# Altium PCB sensorpcb-1.pcbdoc
Units mil, origin at the board's own origin, x right, y up, seen from the top; angles counter-clockwise.
Board outline 3790 x 3065 mil, 2 copper layers (Top Layer, Bottom Layer); 25 components, 27 nets, 65 pads, 0 vias.
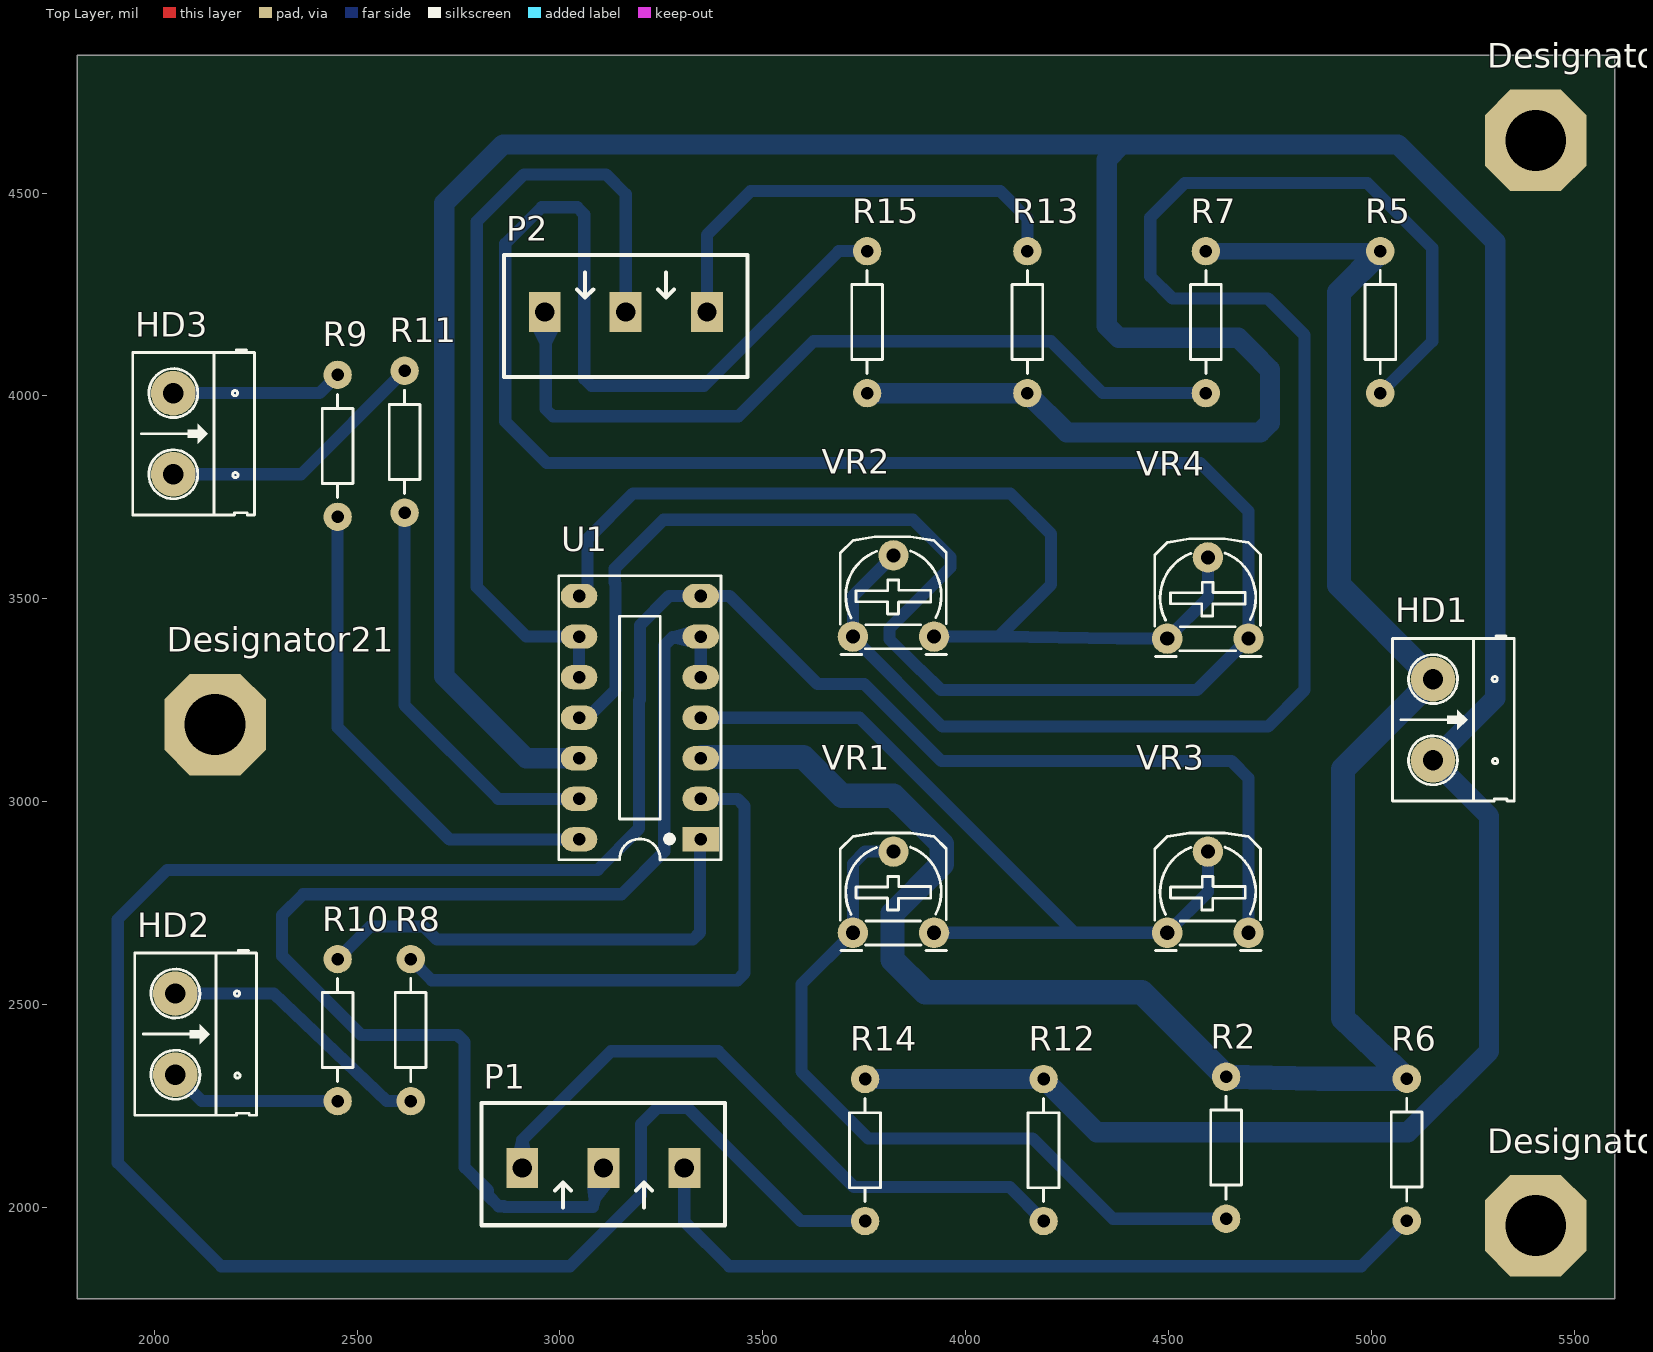
[diagram p0: Top Layer view]
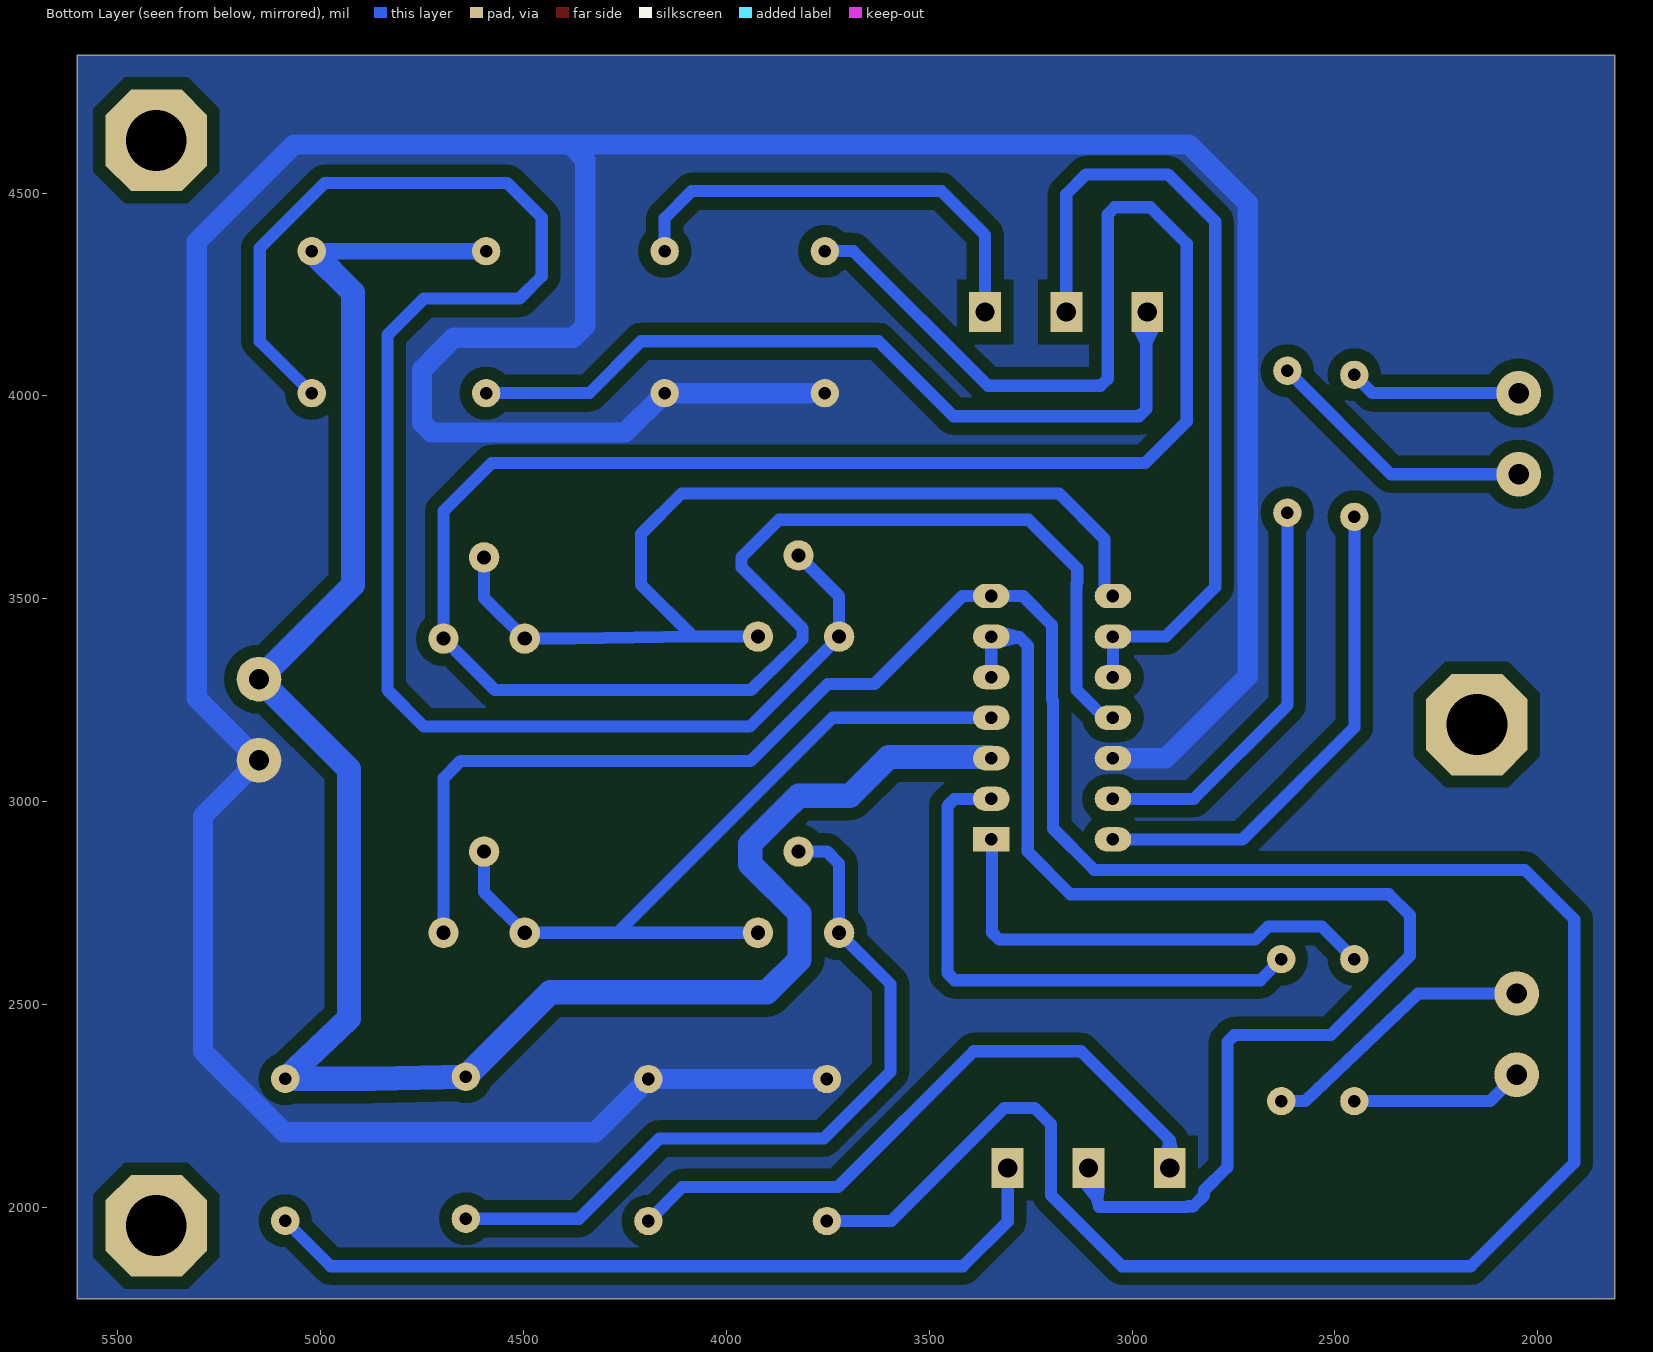
[diagram p1: Bottom Layer view, seen from below]
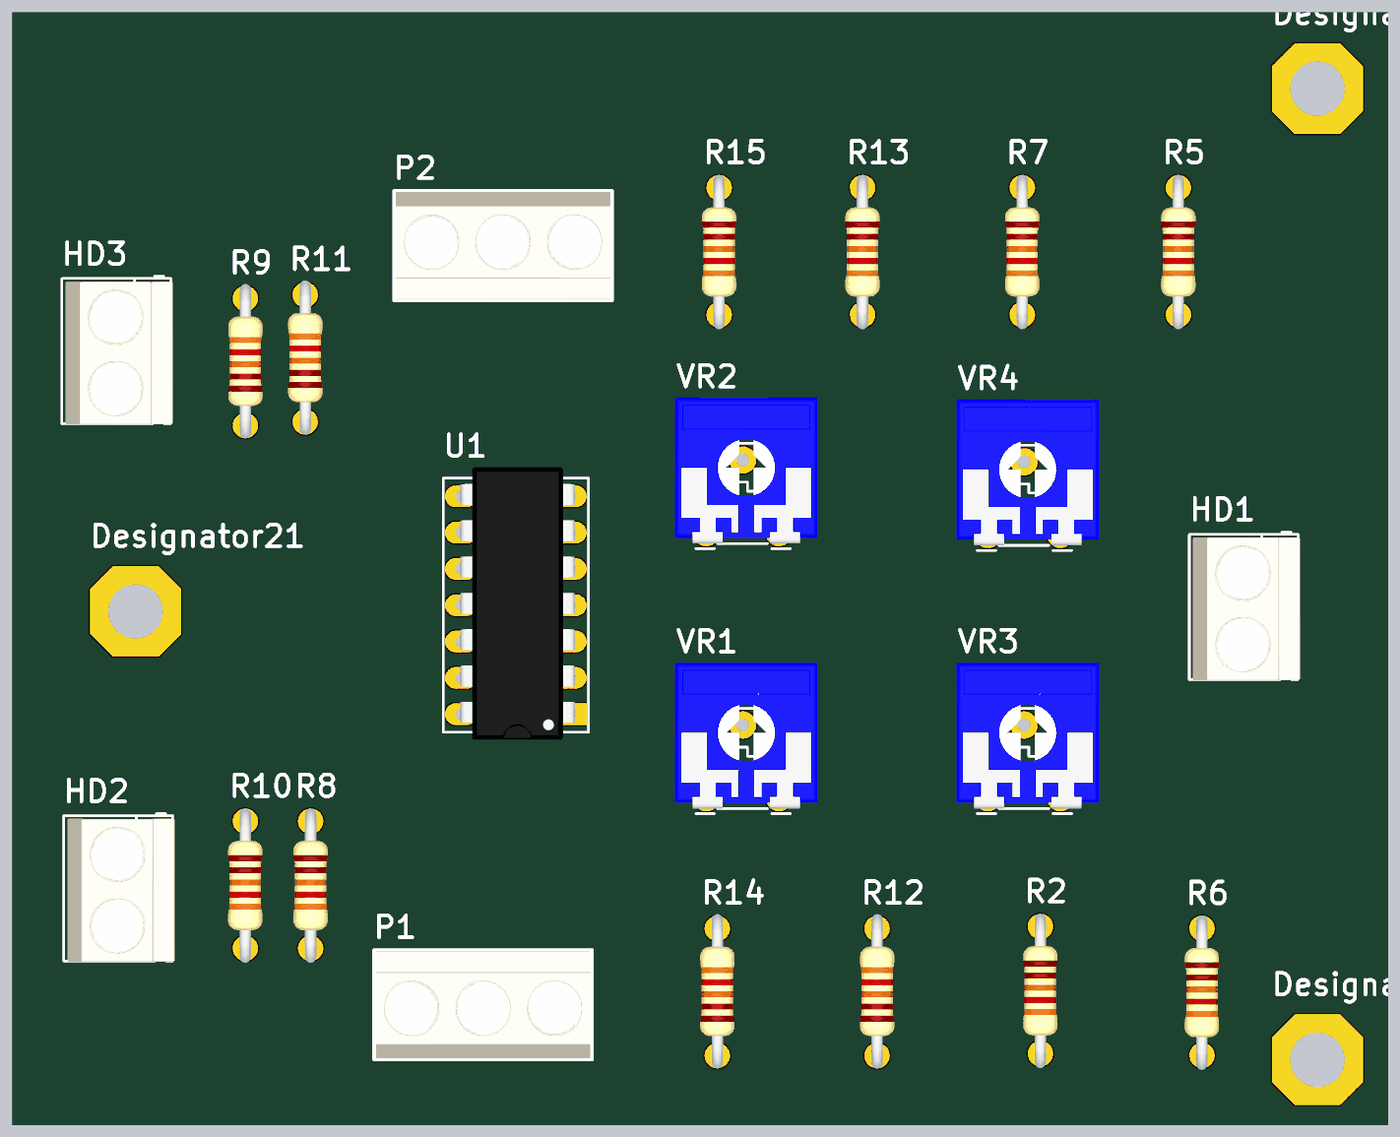
[diagram p2: 3D render of the assembled board from above, using the file's embedded part models]

## Layer stack, top to bottom
Top Solder: solder mask 0.4, Solder Resist, Dk 3.5
Top Layer: signal copper 1.4
Dielectric 1: dielectric 12.6, FR-4, Dk 4.8
Bottom Layer: signal copper 1.4
Bottom Solder: solder mask 0.4, Solder Resist, Dk 3.5

## Board outline
1810,1775 1810,4695 1810,4840 5600,4840 5600,4785 5600,1775

## Design rules (kind name [scope] priority, off if disabled: settings)
Clearance [All] p1: gap=30 ignorepadtopadclearanceinfootprint=FALSE
PlaneConnect [All] p1: planeconnectstyle=Relief reliefexpansion=20 reliefentries=4 reliefconductorwidth=20 reliefairgap=20
PolygonConnect [All] p1: connectstyle=Direct reliefconductorwidth=20 reliefentries=4 polygonreliefangle="90 Angle" airgapwidth=20
RoutingLayers [All] p1: top layer_v5=FALSE bottom layer_v5=TRUE
RoutingVias [All] p1: holewidth=28 width=50 viastyle="Through Hole" minholewidth=28 minwidth=50 maxholewidth=28 maxwidth=50
SolderMaskExpansion [All] p1: expansion=4 istentingtop=FALSE
UnRoutedNet [All] p1: checkbadconnections=TRUE
Width [All] p1: maxlimit=60 minlimit=30 preferedwidth=50
27 further rules are at their usual default settings.

## Classes and differential pairs
component class sensor: HD1 HD2 HD3 P1 P2 R2 R5 R6 R7 R8 R9 R10 R11 R12 R13 R14 R15 U1 VR1 VR2 VR3 VR4

## Components (designator, comment, footprint, x,y, rotation, side; value= is the part's Value field where it differs from the comment)
Designator19 "Comment" VIT 5405,4630 r0 top
Designator20 "Comment" VIT 5405,1955 r0 top
Designator21 "Comment" VIT 2150,3190 r0 top
HD1 "Header 2" HED2 5152,3302 r270 top
HD2 "Header 2" HED2 2052,2527 r270 top
HD3 "Header 2" HED2 2047,4007 r270 top
P1 "Header 3 - M" "Medium - Header 3" 2907,2097 r0 top
P2 "Header 3 - M" "Medium - Header 3" 3362,4207 r180 top
R2 "10k" R1/4W 4642,1972 r90 top value="R1/4W - 1K"
R5 "10k" R1/4W 5022,4007 r90 top value="R1/4W - 1K"
R6 "3.3k" R1/4W 5087,1967 r90 top value="R1/4W - 1K"
R7 "3.3k" R1/4W 4592,4007 r90 top value="R1/4W - 1K"
R8 "10k" R1/4W 2632,2262 r90 top value="R1/4W - 1K"
R9 "10k" R1/4W 2452,4052 r270 top value="R1/4W - 1K"
R10 "10k" R1/4W 2452,2262 r90 top value="R1/4W - 1K"
R11 "10k" R1/4W 2617,4062 r270 top value="R1/4W - 1K"
R12 "3.3k" R1/4W 4192,2316.4 r270 top value="R1/4W - 1K"
R13 "3.3k" R1/4W 4152,4007 r90 top value="R1/4W - 1K"
R14 "10k" R1/4W 3752,2316.4 r270 top value="R1/4W - 1K"
R15 "10k" R1/4W 3757,4007 r90 top value="R1/4W - 1K"
U1 "LM339" DIP14 3347,2907 r90 top
VR1 "100K" VR 3722,2677 r0 top value="VR 10K"
VR2 "100K" VR 3722,3407 r0 top value="VR 10K"
VR3 "20K" VR 4497,2677 r0 top value="VR 10K"
VR4 "20K" VR 4497,3402 r0 top value="VR 10K"

## Footprints (in the part's own frame and the unit in brackets; to place one, negate y for a bottom-side part, rotate by r counter-clockwise, add the part's x,y. Pads: shape width x height; smd on the part's side, far side on the other; paste and mask are expansions set on the pad)
DIP14 [mil] "DIP, 14-Leads, Row Spacing 7.62mm, Pitch 2.54mm, Body 19.2x6.6mm"
  rect 60x90 hole 31: 1(0,0)
  oval 60x90 hole 31: 2(100,0) 3(200,0) 4(300,0) 5(400,0) 6(500,0) 7(600,0) 8(600,300) 9(500,300) 10(400,300) 11(300,300) 12(200,300) 13(100,300) 14(0,300)
  silkscreen extent -50,-50 650,350, body extent -70,-12 680,302, height 145
HED2 [mil] "Header 2, 2 pin, hight 300mil, Pin to Pin 200, Colour Green"
  round 110 hole 50: 1(0,0) 2(200,0)
  silkscreen extent -106,-100 300,200, body extent -92,-90 302,205, height 394
"Medium - Header 3" [mm]
  rect 2x2.5 hole 1.2: 1(0,0) 2(5.08,0) 3(10.147,0)
  silkscreen extent -2.54,-3.58 12.7,4.06, body extent -2.42,-3.51 12.58,3.99, height 10
R1/4W [mil] "R 1/4W, 2 Pin, 350mil"
  round 70 hole 31: 1(0,0) 2(350,0)
  silkscreen extent 48,-38 302,38, body extent -40,-47 386,47, height 111
VIT [mil] "VIT"
  oct 250x250 hole 150: VIT1(0,0)
VR [mil] "Resistor Variable"
  round 75 hole 35: 1(0,0) 2(100,200) 3(200,0)
  silkscreen extent -31,-44 231,246, body extent -87,-30 307,372, height 165

## Part data
HD1 HD2 HD3: library part Hed2, "Header 2 (Green)"
P1 P2: "Header, 3-Pin, Medium", LatestRevisionDate=17-Jul-2002, LatestRevisionNote="Re-released for DXP Platform.", Publisher="Altium Limited"
R2 R5 R6 R7 R8 R9 R10 R11 R12 R13 R14 R15: library part R1/4W, "Resistor 1/4W"
U1: "Low Power Low Offset Voltage Quad Comparators"
VR1 VR2 VR3 VR4: library part VR, "Var Resistor"

## Nets (pads, with @x,y where several pads share a name; then routed paths per layer and width w, separated by ;. In a path a pad name is that pad's centre, name@x,y a point inside that pad or via, vN(x,y) a via of type N, cw(c..) or ccw(c..) an arc to the next point about the centre after c; other vN are vias at no path point)
+5: HD1.1 R2.2 R5.2 R6.2 R7.2 U1.3 | length 5174.4
  Bottom Layer w30: U1.3 U1.3@3350,3110
  Bottom Layer w40: R7.2 R5.2
  Bottom Layer w60: U1.3@3350,3110 3600,3110 3695,3015 3821.89,3015 3862.39,2974.5 3941.09,2895.8 3941.09,2846.09 3819.5,2724.5 3819.5,2610.5 3900,2530 4434,2530 R2.2 4870,2317 R6.2 4930,2466.31 4930,3080 HD1.1 4920,3534 4920,4255 R5.2
+12: 
GND: HD1.2 R12.1 R13.1 R14.1 R15.1 U1.12 | length 10212.9
  Bottom Layer w30: 4347.5,4582.5 4350,4580 ; 4640,4617 4640,4620
  Bottom Layer w50: U1.12 2917,3107 2715,3309 2715,4475 2860,4620 4385,4620 ; R14.1 R12.1 4323.4,2185 5090,2185 5290,2385 5290,2964 HD1.2 5305,3255 5305,4380 5065,4620 4640,4620 4385,4620 ; R15.1 R13.1 4249,3910 4726.57,3910 4750,3933.43 4750,4065 4705,4110 4671.57,4143.43 4376.79,4143.43 4347.5,4172.72 4347.5,4582.5 4385,4620
NetDIO1_1: 
NetDIO2_1: 
NetHD2_1: HD2.1 R8.1 | length 685.9
  Bottom Layer w30: HD2.1 2294.51,2527 2573,2262 2584.99,2262 2585.43,2262 R8.1
NetHD2_2: HD2.2 R10.1 | length 426.9
  Bottom Layer w30: HD2.2 2117,2262 R10.1
NetHD3_1: HD3.1 R9.1 | length 423.6
  Bottom Layer w30: HD3.1 2407,4007 R9.1
NetHD3_2: HD3.2 R11.1 | length 675.6
  Bottom Layer w30: HD3.2 2362,3807 R11.1
NetJP4_1: 
NetJP4_2: 
NetP1_1: P1.1 R12.2 | length 1618.1
  Bottom Layer w30: P1.1 2907,2166 3126,2385 3390,2385 3725,2050 4108.4,2050 R12.2
NetP1_2: P1.2 U1.5 U1.6 | length 3123.7
  Bottom Layer w30: P1.2 3081,2001 2863,2001 2861.21,2002.79 2848.99,2002.79 2822.63,2029.15 2822.63,2041.37 2765,2099 2765,2407.43 2747.43,2425 2510,2425 2315,2620 2315,2720 2367,2772 3152,2772 3257,2877 3257,3384.79 3277.57,3405.36 3345.36,3405.36 U1.6 U1.5
NetP1_3: P1.3 R6.1 | length 2004.2
  Bottom Layer w30: P1.3 3306.5,1965.5 3417,1855 4975,1855 R6.1
NetP2_1: P2.1 R13.2 | length 1133.5
  Bottom Layer w30: P2.1 3362,4397 3470,4505 4085,4505 4152,4438 R13.2
NetP2_2: P2.2 U1.9 U1.10 | length 2029.4
  Bottom Layer w30: U1.10 U1.9 2917,3407 2795,3529 2795,4430 2911.29,4546.29 3113.14,4546.29 3162,4497.43 P2.2
NetP2_3: P2.3 R7.1 | length 2004.4
  Bottom Layer w30: P2.3 2965,4204.5 2965,3967.57 2982.57,3950 3440,3950 3625,4135 4210,4135 4338,4007 R7.1
NetR2_1: R2.1 VR1.1 VR1.2 | length 1874.4
  Bottom Layer w30: VR1.2 3752,2877 3722,2847 VR1.1 3595,2550 3595,2335 3760,2170 4165,2170 4363,1972 R2.1
NetR5_1: R5.1 VR2.1 VR2.2 | length 4152.2
  Bottom Layer w30: VR2.2 3722,3507 3722,3405.47 3942.47,3185 4745,3185 4835,3275 4835,4150 4745,4240 4510,4240 4455,4295 4455,4415 4454.93,4415.07 4454.93,4439.93 4540,4525 4990,4525 5150,4365 5150,4135 R5.1
NetR8_2: R8.2 U1.2 | length 1379
  Bottom Layer w30: R8.2 2684,2560 3437.43,2560 3455,2577.57 3455,2989.43 3437.43,3007 U1.2
NetR9_2: R9.2 U1.14 | length 1228.3
  Bottom Layer w30: R9.2 2452,3183 2728,2907 U1.14
NetR10_2: R10.2 U1.1 | length 1176.9
  Bottom Layer w30: R10.2 2532,2692 2665.14,2692 2697.14,2660 3327.43,2660 3345,2677.57 3345,2905 U1.1
NetR11_2: R11.2 U1.13 | length 999.7
  Bottom Layer w30: R11.2 2617,3238 2848,3007 U1.13
NetR14_2: R14.2 U1.7 VR3.3 | length 6903.5
  Bottom Layer w30: R14.2 3593.6,1966.4 3315,2245 3240,2245 3200,2205 3200,2030 3025,1855 2165,1855 1910,2110 1910,2710 2032,2832 3093.07,2832 3195,2933.93 3195,3249.08 3197,3251.08 3197,3435 3269,3507 U1.7 3418,3507 3635,3290 3750,3290 3940,3100 4655,3100 4697,3058 VR3.3
NetR15_2: R15.2 U1.11 VR4.3 | length 6749.7
  Bottom Layer w30: U1.11 3068.07,3207 3137,3275.93 3137,3538.07 3135,3540.07 3135,3575 3255,3695 3870,3695 3962.57,3602.43 3962.57,3577.57 3811.85,3426.85 3811.85,3400.47 3887.83,3324.5 3889.35,3324.5 3938.85,3275 4570,3275 VR4.3 4697,3716 4578,3835 2967.39,3835 2865,3937.39 2865,4375 2955,4465 3042.43,4465 3060,4447.43 3060,4042.57 3077.57,4025 3355,4025 3687,4357 R15.2
NetU1_4: U1.4 VR1.3 VR3.1 VR3.2 | length 1957
  Bottom Layer w30: U1.4 3738,3207 4268,2677 ; VR1.3 4268,2677 ; VR3.2 4597,2777 VR3.1 4268,2677
NetU1_8: U1.8 VR2.3 VR4.1 VR4.2 | length 2506
  Bottom Layer w30: U1.8 3053.88,3507 3067.74,3520.86 3067.74,3647.74 3180,3760 4110,3760 4210,3660 4210,3535 4082,3407 ; VR2.3 4082,3407 ; VR4.2 4597,3502 VR4.1 4375,3402 4082,3407
pads on no net: Designator19.VIT1 Designator20.VIT1 Designator21.VIT1

## Polygon pours and split planes (outlines as drawn)
GND on Bottom Layer "GND_L02_P000" (solid, remove dead copper, pour order 0): 5600,4840 5600,1775 1810,1775 1810,4840